# Altium PCB UF_Servo.PcbDoc (part 8 of 12)
Units mm, origin at the board's own origin, x right, y up, seen from the top; angles counter-clockwise.
Board outline 222.63 x 100.1 mm, 6 copper layers (L1, L2, L3, L4, L5, L6), stack 1.609 mm thick; 1138 components, 775 nets, 3720 pads, 1641 vias.
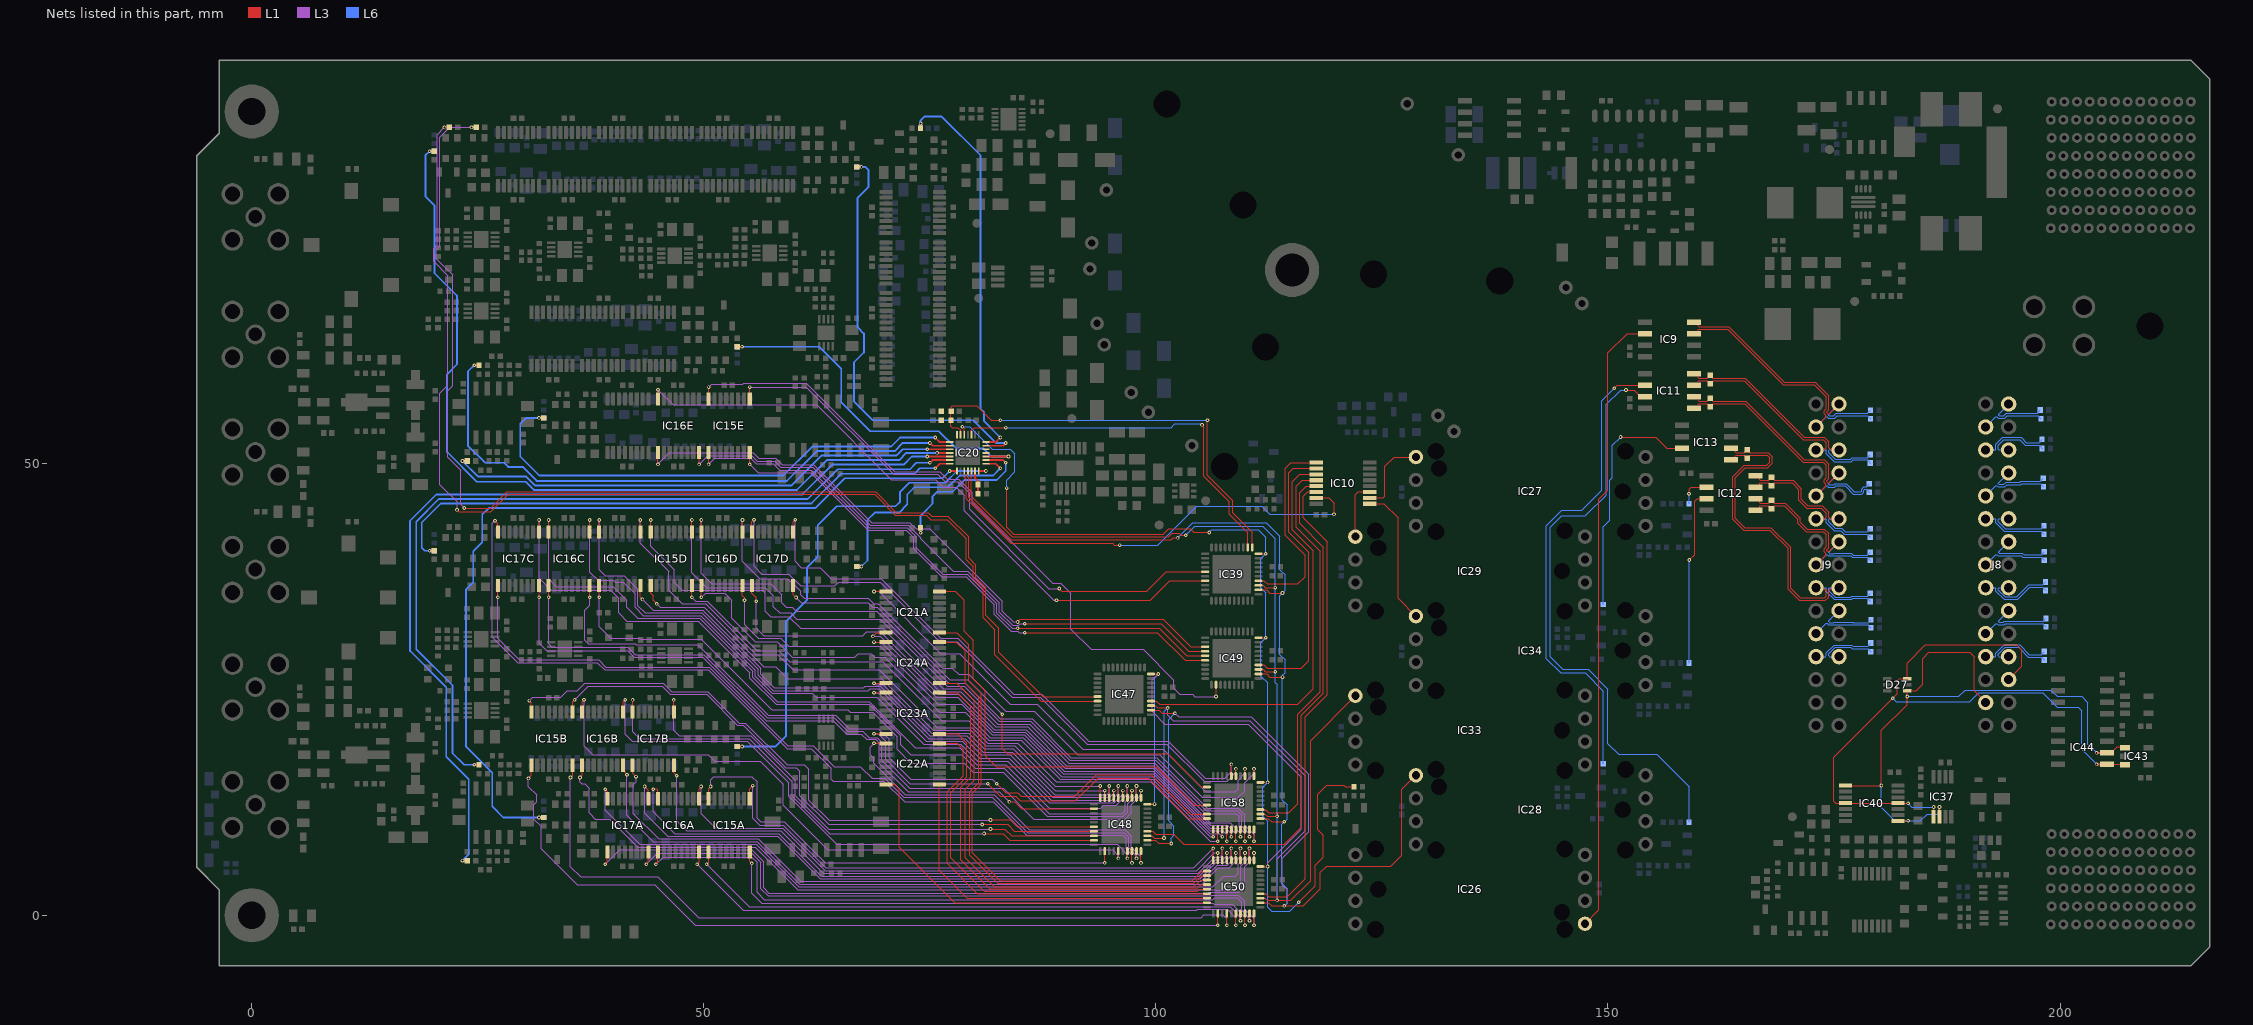
[diagram p9: the nets of this part, all layers, seen from the top]

## Via types
v1: diameter 0.4, hole 0.2, L1 to L6, tented both sides, 1545 vias
v2: diameter 0.4, hole 0.2, L1 to L6, 84 vias
v3: diameter 0.5, hole 0.25, L1 to L6, tented both sides, 12 vias

## Nets (pads, with @x,y where several pads share a name; then routed paths per layer and width w, separated by ;. In a path a pad name is that pad's centre, name@x,y a point inside that pad or via, vN(x,y) a via of type N, cw(c..) or ccw(c..) an arc to the next point about the centre after c; other vN are vias at no path point) (continued)
CAP4.CAP_SEL1.SEL1: IC16E.16 IC49.14 | length 67.4
  L1 w0.1: v1(49.475,49.925) IC16E.16@49.475,51.25 ; v1(85.5,32.3) 100.586,32.3 103.636,29.25 IC49.14@105.45,29.25
  L3 w0.1: v1(49.475,49.925) 50.45,50.9 55.324,50.9 55.924,50.3 57.824,50.3 58.524,49.6 62.024,49.6 68.424,43.2 72.6,43.2 74,41.8 74,41.7 74.4,41.3 77.6,38.1 79.2,38.1 82.7,34.6 82.7,33.6 84.15,32.15 84.845,32.15 84.995,32.3 v1(85.5,32.3)
CAP4.CAP_SEL1.SEL2: IC16E.9 IC49.13 | length 72.2
  L1 w0.1: v1(44.925,49.925) IC16E.9@44.925,51.25 ; v1(84.7,32.5) 85,32.8 100.793,32.8 103.843,29.75 IC49.13@105.45,29.75
  L3 w0.1: v1(44.925,49.925) 46.2,51.2 55.449,51.2 56.049,50.6 57.949,50.6 58.649,49.9 62.149,49.9 68.549,43.5 72.8,43.5 73.5,42.8 75,42.8 83,34.8 83,33.7 84.2,32.5 v1(84.7,32.5)
CAP4.CAP_SEL1.SEL3: IC16E.8 IC39.17 | length 73.1
  L1 w0.1: IC16E.8@44.925,57.15 v1(44.925,58.175) ; v1(89,34.9) 99.386,34.9 101.536,37.05 IC39.17@105.45,37.05
  L3 w0.1: v1(44.925,58.175) 46.6,56.5 62.5,56.5 70.749,48.251 75.649,48.251 76.5,47.4 77.9,47.4 78.8,46.5 78.8,44.8 88.7,34.9 v1(89,34.9)
CAP4.CAP_SEL2.SEL0: IC15E.1 IC39.15 | length 63
  L1 w0.1: IC15E.1@55.075,57.15 v1(55.075,58.475) ; v1(89.3,36.2) 89.6,35.9 98.972,35.9 101.122,38.05 IC39.15@105.45,38.05
  L3 w0.1: v1(55.075,58.475) 61.325,58.475 70.983,48.817 75.883,48.817 76.7,48 78.1,48 79.383,46.717 79.383,44.969 88.151,36.2 v1(89.3,36.2)
CAP4.CAP_SEL2.SEL1: IC15E.16 IC49.16 | length 62
  L1 w0.1: v1(55.075,49.925) IC15E.16@55.075,51.25 ; v1(85.5,31.3) 100.172,31.3 103.222,28.25 IC49.16@105.45,28.25
  L3 w0.1: v1(55.075,49.925) 56,49 61.8,49 63.8,47 68.183,42.617 72.383,42.617 73.2,41.8 73.2,40.6 76.3,37.5 79,37.5 82.119,34.381 82.119,33.356 84.026,31.45 84.745,31.45 84.895,31.3 v1(85.5,31.3)
CAP4.CAP_SEL2.SEL2: IC15E.9 IC49.15 | length 66.9
  L1 w0.1: v1(50.525,49.925) IC15E.9@50.525,51.25 ; v1(84.7,31.8) 100.379,31.8 103.429,28.75 IC49.15@105.45,28.75
  L3 w0.1: v1(50.525,49.925) 51.2,50.6 55.2,50.6 55.8,50 57.7,50 58.4,49.3 61.9,49.3 68.3,42.9 72.5,42.9 73.483,41.917 73.483,40.717 76.4,37.8 79.124,37.8 82.419,34.505 82.419,33.481 84.1,31.8 v1(84.7,31.8)
CAP4.CAP_SEL2.SEL3: IC15E.8 IC49.22 | length 76.8
  L1 w0.1: IC15E.8@50.525,57.15 v1(50.525,58.475) ; v1(106.65,24.25) IC49.22@106.65,25.55
  L3 w0.1: v1(50.525,58.475) 50.85,58.8 54.3,58.8 54.4,58.9 61.3,58.9 71.1,49.1 76.1,49.1 76.9,48.3 78.2,48.3 79.7,46.8 79.7,45.7 88.6,36.8 89.5,36.8 90.6,35.7 90.6,31.7 92.823,29.477 98.577,29.477 102,26.054 102,25.155 102.655,24.5 104.05,24.5 104.3,24.25 v1(106.65,24.25)
CAP5.CAP_SEL0.SEL0: IC15C.1 IC58.22 | length 83.9
  L1 w0.1: IC15C.1@42.975,42.45 v1(42.975,43.775) ; v1(106.85,8.25) IC58.22@106.85,9.55
  L3 w0.1: v1(42.975,43.775) 42.975,41.225 46.1,38.1 46.1,36 47.6,34.5 50.2,34.5 55.8,28.9 58.2,28.9 59.9,27.2 69.4,27.2 75.8,20.8 79.7,20.8 81.4,19.1 84.7,19.1 89,14.8 99.45,14.8 106,8.25 v1(106.85,8.25)
CAP5.CAP_SEL0.SEL1: IC15C.16 IC48.8 | length 64.9
  L1 w0.1: IC15C.16@42.975,36.55 42.975,35.225 v1(43.2,35) ; IC48.8@94.85,13.05 v1(94.85,14.35)
  L3 w0.1: v1(43.2,35) 44.4,33.8 49.897,33.8 56.3,27.397 56.3,26.7 57.8,25.2 67.7,25.2 67.875,25.375 69.525,25.375 75,19.9 79.1,19.9 80.9,18.1 84.1,18.1 88.8,13.4 94.6,13.4 94.85,13.65 v1(94.85,14.35)
CAP5.CAP_SEL0.SEL2: IC15C.9 IC48.2 | length 77.3
  L1 w0.1: v1(38.425,35.225) IC15C.9@38.425,36.55 ; IC48.2@97.85,13.05 v1(97.85,14.35)
  L3 w0.1: v1(38.425,35.225) 38.425,31.975 39.7,30.7 42.9,30.7 43,30.6 49.7,30.6 57.5,22.8 65.9,22.8 66.2,22.5 68.7,22.5 71.4,19.8 71.4,18.4 72.9,16.9 78.8,16.9 79.8,15.9 83.1,15.9 88,11 96.4,11 96.9,11.5 96.9,12.4 97.85,13.35 v1(97.85,14.35)
CAP5.CAP_SEL0.SEL3: IC15C.8 IC48.7 | length 77.1
  L1 w0.1: IC15C.8@38.425,42.45 v1(38.425,43.775) ; IC48.7@95.35,13.05 v1(95.35,13.85)
  L3 w0.1: v1(38.425,43.775) 38.425,38.275 39.1,37.6 41.2,37.6 42.7,36.1 42.7,34.3 43.5,33.5 49.773,33.5 56,27.273 56,26.6 57.7,24.9 68.2,24.9 68.4,25.1 69.4,25.1 74.9,19.6 78.9,19.6 80.7,17.8 83.9,17.8 88.6,13.1 94.9,13.1 95.35,13.55 v1(95.35,13.85)
CAP5.CAP_SEL1.SEL0: IC16C.1 IC48.5 | length 79.5
  L1 w0.1: IC16C.1@37.375,42.45 v1(37.375,43.775) ; IC48.5@96.35,13.05 v1(96.35,13.85)
  L3 w0.1: v1(37.375,43.775) 37.375,38.025 38.3,37.1 40,37.1 40.2,36.9 41.1,36.9 42.4,35.6 42.4,34.1 43.3,33.2 49.649,33.2 55.7,27.149 55.7,26.5 57.58,24.62 61.998,24.62 62.418,24.2 69.1,24.2 74.3,19 78.4,19 80.3,17.1 83.6,17.1 88.2,12.5 95.4,12.5 96.35,13.45 v1(96.35,13.85)
CAP5.CAP_SEL1.SEL1: IC16C.16 IC58.18 | length 86.3
  L1 w0.1: v1(37.375,35.225) IC16C.16@37.375,36.55 ; v1(82.4,14.6) 83.4,13.6 84.7,13.6 85.1,13.2 91,13.2 93.4,15.6 99.5,15.6 103.85,11.25 IC58.18@105.65,11.25
  L3 w0.1: v1(37.375,35.225) 37.375,34.375 36.8,33.8 36.8,30.5 37.2,30.1 42.4,30.1 42.5,30 49.3,30 57.1,22.2 64.6,22.2 66.1,20.7 69.3,20.7 70.5,19.5 70.5,17.5 72.9,15.1 81.9,15.1 v1(82.4,14.6)
CAP5.CAP_SEL1.SEL2: IC16C.9 IC48.1 | length 84.1
  L1 w0.1: v1(32.825,35.225) IC16C.9@32.825,36.55 ; IC48.1@98.35,13.05 v1(98.35,13.85)
  L3 w0.1: v1(32.825,35.225) 32.825,30.075 33.2,29.7 41.6,29.7 42.4,28.9 50,28.9 57,21.9 64.4,21.9 65.9,20.4 67.6,20.4 68.3,19.7 69.2,19.7 69.7,19.2 69.7,17.2 72.8,14.1 83.1,14.1 86.5,10.7 96.6,10.7 97.3,11.4 97.3,12.3 98.35,13.35 v1(98.35,13.85)
CAP5.CAP_SEL1.SEL3: IC16C.8 IC48.4 | length 86
  L1 w0.1: IC16C.8@32.825,42.45 v1(32.825,43.775) ; IC48.4@96.85,13.05 v1(96.85,14.35)
  L3 w0.1: v1(32.825,43.775) 32.825,37.275 33.7,36.4 40,36.4 41.5,34.9 41.5,34.1 42.7,32.9 49.524,32.9 55.4,27.024 55.4,26.4 58.1,23.7 68.3,23.7 73.4,18.6 78.3,18.6 80.2,16.7 83.4,16.7 88.2,11.9 93.9,11.9 94.2,12.2 95.6,12.2 96.85,13.45 v1(96.85,14.35)
CAP5.CAP_SEL2.SEL0: IC17C.1 IC48.3 | length 88.7
  L1 w0.1: IC17C.1@31.775,42.45 v1(31.775,43.775) ; IC48.3@97.35,13.05 v1(97.35,13.85)
  L3 w0.1: v1(31.775,43.775) 31.775,37.325 33.1,36 39.7,36 40.6,35.1 40.6,33.5 41.5,32.6 49.4,32.6 55.1,26.9 55.1,26.3 58,23.4 68.3,23.4 71.8,19.9 71.8,18.9 72.9,17.8 78.5,17.8 80,16.3 83.2,16.3 88.2,11.3 96.3,11.3 96.6,11.6 96.6,12.6 97.35,13.35 v1(97.35,13.85)
CAP5.CAP_SEL2.SEL1: IC17C.16 IC48.12 | length 76.7
  L1 w0.1: v1(31.775,35.225) IC17C.16@31.775,36.55 ; v1(83.8,12.6) 84.4,12.6 85.15,11.85 IC48.12@93.15,11.85
  L3 w0.1: v1(31.775,35.225) 31.775,30.125 32.6,29.3 41.6,29.3 42.3,28.6 49.9,28.6 56.9,21.6 64.3,21.6 65.8,20.1 67.4,20.1 68,19.5 69,19.5 69.4,19.1 69.4,16.9 72.6,13.7 82.7,13.7 v1(83.8,12.6)
CAP5.CAP_SEL2.SEL2: IC17C.9 IC48.29 | length 88.3
  L1 w0.1: v1(27.225,35.225) IC17C.9@27.225,36.55 ; v1(97.85,6.35) IC48.29@97.85,7.15
  L3 w0.1: v1(27.225,35.225) 27.225,30.675 29.6,28.3 38.349,28.3 39.149,27.5 50.6,27.5 59.3,18.8 62.1,18.8 64.4,16.5 67.3,16.5 68.6,15.2 70,15.2 72.1,13.1 81.9,13.1 85.8,9.2 96.5,9.2 97,8.7 97,7.5 97.85,6.65 v1(97.85,6.35)
CAP5.CAP_SEL2.SEL3: IC17C.8 IC48.28 | length 98.7
  L1 w0.1: v1(26.9,43.7) 27.225,43.375 IC17C.8@27.225,42.45 ; v1(97.35,5.85) IC48.28@97.35,7.15
  L3 w0.1: v1(26.9,43.7) 26.6,43.4 26.6,30.8 29.4,28 38.224,28 39.024,27.2 50.5,27.2 59.2,18.5 61.9,18.5 64.1,16.3 64.1,15.1 64.3,14.9 69.9,14.9 72.2,12.6 82,12.6 85.7,8.9 96.4,8.9 96.7,8.6 96.7,7.4 97.35,6.75 v1(97.35,5.85)
CAP6.CAP_SEL0.SEL0: IC15D.1 IC48.10 | length 61
  L1 w0.1: IC15D.1@44.125,36.55 44.125,35.675 44.4,35.4 44.4,34.9 v1(44.8,34.5) ; IC48.10@93.85,13.05 v1(93.85,14.35)
  L3 w0.1: v1(44.8,34.5) 45.2,34.1 50.021,34.1 56.6,27.521 57.979,27.521 59.3,26.2 69.7,26.2 75.4,20.5 79.5,20.5 81.2,18.8 84.4,18.8 88.85,14.35 v1(93.85,14.35)
CAP6.CAP_SEL0.SEL1: IC15D.16 IC58.28 | length 88
  L1 w0.1: IC15D.16@44.125,42.45 v1(44.125,43.775) ; v1(109.85,8.25) IC58.28@109.85,9.55
  L3 w0.1: v1(44.125,43.775) 44.125,40.875 46.7,38.3 46.7,36.9 47.6,36 56.5,36 56.8,35.7 56.8,33.7 57.4,33.1 59.4,33.1 60.7,31.8 69.8,31.8 76.5,25.1 78.6,25.1 82.5,21.2 86.051,21.2 90.351,16.9 99.851,16.9 105.451,11.3 108.9,11.3 109.2,11 109.2,9.8 109.85,9.15 v1(109.85,8.25)
CAP6.CAP_SEL0.SEL2: IC15D.9 IC58.29 | length 83.3
  L1 w0.1: IC15D.9@48.675,42.45 v1(48.675,43.775) ; v1(110.35,8.75) IC58.29@110.35,9.55
  L3 w0.1: v1(48.675,43.775) 48.675,37.925 50.3,36.3 56.8,36.3 57.7,35.4 57.7,34.2 58.4,33.5 59.6,33.5 60.3,32.8 69.5,32.8 76.9,25.4 78.8,25.4 82.7,21.5 86.175,21.5 90.475,17.2 99.976,17.2 105.576,11.6 109,11.6 109.5,11.1 109.5,9.9 110.35,9.05 v1(110.35,8.75)
CAP6.CAP_SEL0.SEL3: IC15D.8 IC58.21 | length 70.8
  L1 w0.1: v1(48.675,35.225) IC15D.8@48.675,36.55 ; v1(106.35,8.75) IC58.21@106.35,9.55
  L3 w0.1: v1(48.675,35.225) 49.1,34.8 50.4,34.8 55.9,29.3 58.3,29.3 59.5,28.1 69.8,28.1 76.3,21.6 79.3,21.6 81.5,19.4 85.107,19.4 89.407,15.1 99.65,15.1 106,8.75 v1(106.35,8.75)
CAP6.CAP_SEL1.SEL0: IC16D.1 IC58.23 | length 72.6
  L1 w0.1: v1(49.725,35.225) IC16D.1@49.725,36.55 ; v1(107.35,8.75) IC58.23@107.35,9.55
  L3 w0.1: v1(49.725,35.225) 50.2,35.7 52.3,35.7 53.1,34.9 53.1,32.9 55.7,30.3 58.1,30.3 59.8,28.6 66.7,28.6 67.1,29 68.5,29 68.9,28.6 70,28.6 76.1,22.5 78.9,22.5 81.7,19.7 85.302,19.7 89.602,15.4 99.7,15.4 106,9.1 107,9.1 v1(107.35,8.75)
CAP6.CAP_SEL1.SEL1: IC16D.16 IC58.30 | length 83.6
  L1 w0.1: IC16D.16@49.725,42.45 v1(49.725,43.775) ; v1(110.85,8.25) IC58.30@110.85,9.55
  L3 w0.1: v1(49.725,43.775) 49.725,37.875 50.9,36.7 57.4,36.7 58.6,35.5 58.6,34.6 59.1,34.1 59.8,34.1 60.2,33.7 69.1,33.7 77.1,25.7 78.9,25.7 82.8,21.8 86.299,21.8 90.599,17.5 100.1,17.5 105.7,11.9 109.1,11.9 109.8,11.2 109.8,10 110.85,8.95 v1(110.85,8.25)
CAP6.CAP_SEL1.SEL2: IC16D.9 IC58.1 | length 76.4
  L1 w0.1: IC16D.9@54.275,42.45 v1(54.275,43.775) ; IC58.1@110.85,15.45 v1(110.85,16.25)
  L3 w0.1: v1(54.275,43.775) 54.275,39.225 56.2,37.3 59.3,37.3 60.7,35.9 60.7,35.5 61.1,35.1 68.2,35.1 68.8,34.5 69.3,34.5 76.4,27.4 77.5,27.4 78.2,26.7 79.3,26.7 83.4,22.6 86.566,22.6 91.366,17.8 100.4,17.8 105.1,13.1 109.1,13.1 109.8,13.8 109.8,14.7 110.85,15.75 v1(110.85,16.25)
CAP6.CAP_SEL1.SEL3: IC16D.8 IC58.24 | length 69.4
  L1 w0.1: IC16D.8@54.275,36.55 54.275,35.425 54.5,35.2 v1(54.5,34.9) ; v1(107.85,8.25) IC58.24@107.85,9.55
  L3 w0.1: v1(54.5,34.9) 54.5,32.2 56,30.7 58.5,30.7 59.4,29.8 69.5,29.8 75.9,23.4 78.5,23.4 81.9,20 85.426,20 89.726,15.7 99.7,15.7 106,9.4 107.4,9.4 107.85,8.95 v1(107.85,8.25)
CAP6.CAP_SEL2.SEL0: IC17D.1 IC58.27 | length 69.4
  L1 w0.1: IC17D.1@55.325,36.55 55.325,35.675 55.8,35.2 v1(55.8,34.8) ; v1(109.35,8.75) IC58.27@109.35,9.55
  L3 w0.1: v1(55.8,34.8) 55.8,31.8 56.6,31 67.6,31 68,31.4 69.5,31.4 76.1,24.8 78.4,24.8 82.3,20.9 85.799,20.9 90.099,16.6 99.7,16.6 106,10.3 108.2,10.3 109.35,9.15 v1(109.35,8.75)
CAP6.CAP_SEL2.SEL1: IC17D.16 IC58.5 | length 71.7
  L1 w0.1: IC17D.16@55.325,42.45 55.325,43.575 v1(55.55,43.8) ; IC58.5@108.85,15.45 v1(108.85,16.25)
  L3 w0.1: v1(55.55,43.8) 55.55,38.65 56.4,37.8 59.4,37.8 60.7,36.5 64.5,36.5 64.9,36.9 69.5,36.9 76.1,30.3 78,30.3 84.1,24.2 87.228,24.2 92.428,19 101.221,19 105.321,14.9 107.9,14.9 108.85,15.85 v1(108.85,16.25)
CAP6.CAP_SEL2.SEL2: IC17D.9 IC58.6 | length 66.6
  L1 w0.1: IC17D.9@59.875,42.45 59.875,43.575 v1(60.1,43.8) ; IC58.6@108.35,15.45 v1(108.35,16.75)
  L3 w0.1: v1(60.1,43.8) 60.1,39.2 60.8,38.5 62.9,38.5 64.1,37.3 69.6,37.3 76.2,30.7 78.1,30.7 84.3,24.5 87.353,24.5 92.553,19.3 101.346,19.3 105.446,15.2 107.6,15.2 108.35,15.95 v1(108.35,16.75)
CAP6.CAP_SEL2.SEL3: IC17D.8 IC58.12 | length 57.8
  L1 w0.1: IC17D.8@59.875,36.55 59.875,35.525 v1(60.2,35.2) ; v1(83,22.3) 83,18.5 83.6,17.9 101.3,17.9 104.95,14.25 IC58.12@105.65,14.25
  L3 w0.1: v1(60.2,35.2) 60.8,34.6 68.2,34.6 68.7,34.1 69.2,34.1 77.2,26.1 79.2,26.1 v1(83,22.3)
CAP7.CAP_SEL0.SEL0: IC22A.1 IC50.18 | length 40.4
  L1 w0.1: IC22A.1@76.05,14.525 76.05,5.05 79.15,1.95 IC50.18@105.65,1.95
CAP7.CAP_SEL0.SEL1: IC22A.16 IC50.19 | length 44.7
  L1 w0.1: IC22A.16@70.15,14.525 71.075,14.525 71.6,14 71.6,7.6 77.75,1.45 IC50.19@105.65,1.45
CAP7.CAP_SEL0.SEL2: IC22A.9 IC48.30 | length 40.4
  L1 w0.1: v1(68.825,19.075) IC22A.9@70.15,19.075 ; v1(98.35,5.85) IC48.30@98.35,7.15
  L3 w0.1: v1(68.825,19.075) 68.4,18.65 68.4,17.8 68.8,17.4 68.8,16.9 72.3,13.4 82.1,13.4 86,9.5 96.6,9.5 97.3,8.8 97.3,7.6 98.35,6.55 v1(98.35,5.85)
CAP7.CAP_SEL0.SEL3: IC22A.8 IC50.17 | length 46.4
  L1 w0.1: IC22A.8@76.05,19.075 78.025,19.075 78.7,18.4 78.7,15.5 76.9,13.7 76.9,5.8 80.25,2.45 IC50.17@105.65,2.45
CAP7.CAP_SEL1.SEL0: IC23A.1 IC50.16 | length 46.9
  L1 w0.1: IC23A.1@76.05,20.125 78.075,20.125 79.1,19.1 79.1,15.4 77.3,13.6 77.3,6.4 81,2.7 104.6,2.7 104.85,2.95 IC50.16@105.65,2.95
CAP7.CAP_SEL1.SEL1: IC23A.16 IC58.19 | length 45.3
  L1 w0.1: v1(68.825,20.125) IC23A.16@70.15,20.125 ; v1(81.4,14.6) 82.8,13.2 84.5,13.2 85,12.7 91.1,12.7 93.6,15.2 99.2,15.2 103.65,10.75 IC58.19@105.65,10.75
  L3 w0.1: v1(68.825,20.125) 69.275,20.125 70.1,19.3 70.1,17.3 72.8,14.6 v1(81.4,14.6)
CAP7.CAP_SEL1.SEL2: IC23A.9 IC48.6 | length 35.7
  L1 w0.1: v1(68.825,24.675) IC23A.9@70.15,24.675 ; IC48.6@95.85,13.05 v1(95.85,14.35)
  L3 w0.1: v1(68.825,24.675) 69.225,24.675 74.6,19.3 78.6,19.3 80.5,17.4 83.8,17.4 88.4,12.8 95.1,12.8 95.85,13.55 v1(95.85,14.35)
CAP7.CAP_SEL1.SEL3: IC23A.8 IC50.15 | length 50.3
  L1 w0.1: IC23A.8@76.05,24.675 78.025,24.675 79.5,23.2 79.5,15.3 78.4,14.2 78.4,6.2 81.6,3 104.5,3 104.95,3.45 IC50.15@105.65,3.45
CAP7.CAP_SEL2.SEL0: IC24A.1 IC50.14 | length 50.8
  L1 w0.1: IC24A.1@76.05,25.725 77.975,25.725 79.9,23.8 79.9,15 78.9,14 78.9,6.4 82.1,3.2 104.2,3.2 104.95,3.95 IC50.14@105.65,3.95
CAP7.CAP_SEL2.SEL1: IC24A.16 IC48.9 | length 32.6
  L1 w0.1: v1(68.825,25.725) IC24A.16@70.15,25.725 ; IC48.9@94.35,13.05 v1(94.35,13.85)
  L3 w0.1: v1(68.825,25.725) 68.884,25.725 69.034,25.575 69.825,25.575 75.2,20.2 79.3,20.2 81,18.5 84.2,18.5 88.85,13.85 v1(94.35,13.85)
CAP7.CAP_SEL2.SEL2: IC24A.9 IC58.25 | length 50.7
  L1 w0.1: v1(68.825,30.275) IC24A.9@70.15,30.275 ; v1(108.35,8.75) IC58.25@108.35,9.55
  L3 w0.1: v1(68.825,30.275) 69.625,30.275 75.7,24.2 78.1,24.2 82,20.3 85.551,20.3 89.851,16 99.7,16 106,9.7 107.7,9.7 108.35,9.05 v1(108.35,8.75)
CAP7.CAP_SEL2.SEL3: IC24A.8 IC50.13 | length 54.8
  L1 w0.1: IC24A.8@76.05,30.275 77.925,30.275 78.9,29.3 78.9,25.7 80.4,24.2 80.4,14.7 79.4,13.7 79.4,6.7 82.5,3.6 104.2,3.6 105.05,4.45 IC50.13@105.65,4.45
CAP7.CAP_SEL3.SEL0: IC21A.1 IC50.12 | length 55.5
  L1 w0.1: IC21A.1@76.05,31.325 77.975,31.325 79.3,30 79.3,26 80.7,24.6 80.7,14.576 79.7,13.576 79.7,7 82.8,3.9 104,3.9 105.05,4.95 IC50.12@105.65,4.95
CAP7.CAP_SEL3.SEL1: IC21A.16 IC58.26 | length 52.9
  L1 w0.1: v1(68.7,30.9) 69.125,31.325 IC21A.16@70.15,31.325 ; v1(108.85,8.25) IC58.26@108.85,9.55
  L3 w0.1: v1(68.7,30.9) 69.5,30.9 75.9,24.5 78.2,24.5 82.1,20.6 85.675,20.6 89.975,16.3 99.7,16.3 106,10 107.9,10 108.85,9.05 v1(108.85,8.25)
CAP7.CAP_SEL3.SEL2: IC21A.9 IC58.3 | length 54.3
  L1 w0.1: v1(68.825,35.875) IC21A.9@70.15,35.875 ; IC58.3@109.85,15.45 v1(109.85,16.25)
  L3 w0.1: v1(68.825,35.875) 69.325,35.875 76.2,29 78.3,29 83.9,23.4 86.897,23.4 91.897,18.4 100.8,18.4 105.5,13.7 108.8,13.7 109.1,14 109.1,15 109.85,15.75 v1(109.85,16.25)
CAP7.CAP_SEL3.SEL3: IC21A.8 IC58.16 | length 48.1
  L1 w0.1: IC21A.8@76.05,35.875 77.825,35.875 78.8,34.9 78.8,31.5 79.8,30.5 79.8,26.2 81.1,24.9 81.1,17.7 82.339,16.461 100.039,16.461 104.25,12.25 IC58.16@105.65,12.25
CAP8.CAP_SEL0.SEL0: IC17B.1 IC50.5 | length 77.7
  L1 w0.1: IC17B.1@42.125,16.65 42.125,15.775 v1(42.5,15.4) ; IC50.5@108.85,6.15 v1(108.85,6.95)
  L3 w0.1: v1(42.5,15.4) 42.5,14.8 42.2,14.5 42.2,11.3 45,8.5 56,8.5 60.7,3.8 105,3.8 106.8,5.6 107.9,5.6 108.85,6.55 v1(108.85,6.95)
CAP8.CAP_SEL0.SEL1: IC17B.16 IC48.19 | length 61.8
  L1 w0.1: IC17B.16@42.125,22.55 v1(42.125,23.875) ; v1(81,9.1) 83.1,9.1 83.85,8.35 IC48.19@93.15,8.35
  L3 w0.1: v1(42.125,23.875) 42.125,20.375 42.9,19.6 55,19.6 59.8,14.8 59.8,13.2 63.9,9.1 v1(81,9.1)
CAP8.CAP_SEL0.SEL2: IC17B.9 IC48.18 | length 57
  L1 w0.1: IC17B.9@46.675,22.55 v1(46.675,23.875) ; v1(81.7,9.6) 83.3,9.6 84.05,8.85 IC48.18@93.15,8.85
  L3 w0.1: v1(46.675,23.875) 46.675,20.525 47.3,19.9 55.2,19.9 60.1,15 60.1,13.3 63.8,9.6 v1(81.7,9.6)
CAP8.CAP_SEL0.SEL3: IC17B.8 IC50.8 | length 71.9
  L1 w0.1: IC17B.8@46.675,16.65 46.675,15.825 v1(47,15.5) ; IC50.8@107.35,6.15 v1(107.35,7.45)
  L3 w0.1: v1(47,15.5) 47,10.5 48.1,9.4 58.5,9.4 63.2,4.7 104.7,4.7 106.5,6.5 107.1,6.5 107.35,6.75 v1(107.35,7.45)
CAP8.CAP_SEL1.SEL0: IC16B.1 IC50.2 | length 87.6
  L1 w0.1: v1(36.3,15.3) 36.525,15.525 IC16B.1@36.525,16.65 ; IC50.2@110.35,6.15 v1(110.35,7.45)
  L3 w0.1: v1(36.3,15.3) 36.3,14.8 36.5,14.6 36.8,14.6 37.3,14.1 37.3,11.4 38,10.7 39.6,10.7 42.7,7.6 55.7,7.6 60.4,2.9 106.6,2.9 106.7,2.8 108.9,2.8 109.4,3.3 109.4,5.5 110.35,6.45 v1(110.35,7.45)
CAP8.CAP_SEL1.SEL1: IC16B.16 IC48.25 | length 73.2
  L1 w0.1: IC16B.16@36.525,22.55 36.525,23.675 v1(36.75,23.9) ; v1(95.85,6.35) IC48.25@95.85,7.15
  L3 w0.1: v1(36.75,23.9) 36.75,18.75 37.7,17.8 50.5,17.8 51.2,17.1 56.266,17.1 58.8,14.566 58.8,12.2 63.7,7.3 95.2,7.3 95.85,6.65 v1(95.85,6.35)
CAP8.CAP_SEL1.SEL2: IC16B.9 IC48.27 | length 68.4
  L1 w0.1: IC16B.9@41.075,22.55 41.075,23.675 v1(41.3,23.9) ; v1(96.85,6.35) IC48.27@96.85,7.15
  L3 w0.1: v1(41.3,23.9) 41.3,20.1 42.1,19.3 54.8,19.3 59.4,14.7 59.4,13.2 64.7,7.9 95.7,7.9 96.85,6.75 v1(96.85,6.35)
CAP8.CAP_SEL1.SEL3: IC16B.8 IC50.4 | length 80.2
  L1 w0.1: IC16B.8@41.075,16.65 41.075,16.15 41.3,15.925 41.3,15.8 v1(41.5,15.6) ; IC50.4@109.35,6.15 v1(109.35,7.45)
  L3 w0.1: v1(41.5,15.6) 41.5,11.1 44.4,8.2 55.9,8.2 60.6,3.5 105.1,3.5 106.9,5.3 108.1,5.3 109.35,6.55 v1(109.35,7.45)
CAP8.CAP_SEL2.SEL0: IC15B.1 IC50.22 | length 89.9
  L1 w0.1: v1(30.6,15.2) 30.925,15.525 IC15B.1@30.925,16.65 ; v1(106.85,-1.05) IC50.22@106.85,0.25
  L3 w0.1: v1(30.6,15.2) 30.6,14.3 31.5,13.4 31.5,12.6 31.2,12.3 31.2,10.7 32,9.9 32,7.4 35.983,3.417 44.583,3.417 49.05,-1.05 v1(106.85,-1.05)
CAP8.CAP_SEL2.SEL1: IC15B.16 IC48.16 | length 73.2
  L1 w0.1: v1(30.7,23.8) 30.925,23.575 IC15B.16@30.925,22.55 ; v1(81.7,10.6) 83.9,10.6 84.65,9.85 IC48.16@93.15,9.85
  L3 w0.1: v1(30.7,23.8) 31.1,24.2 34.2,24.2 34.9,24.9 36,24.9 36.8,25.7 45.524,25.7 46.424,24.8 50.424,24.8 53.912,21.312 54.588,21.312 59.2,16.7 61.1,16.7 61.6,16.2 61.6,12.8 63.847,10.553 81.653,10.553 v1(81.7,10.6)
CAP8.CAP_SEL2.SEL2: IC15B.9 IC48.17 | length 67.7
  L1 w0.1: IC15B.9@35.475,22.55 35.475,23.675 v1(35.7,23.9) ; v1(80.8,10.1) 83.6,10.1 84.35,9.35 IC48.17@93.15,9.35
  L3 w0.1: v1(35.7,23.9) 37.2,25.4 45.4,25.4 46.3,24.5 50.3,24.5 53.7,21.1 54.376,21.1 59.076,16.4 60.2,16.4 60.6,16 60.6,13.3 63.8,10.1 v1(80.8,10.1)
CAP8.CAP_SEL2.SEL3: IC15B.8 IC50.24 | length 88.5
  L1 w0.1: v1(35.25,15.3) 35.475,15.525 IC15B.8@35.475,16.65 ; v1(107.85,-1.05) IC50.24@107.85,0.25
  L3 w0.1: v1(35.25,15.3) 35.25,5.45 36.4,4.3 44.924,4.3 49.424,-0.2 105,-0.2 105.3,0.1 107.4,0.1 107.85,-0.35 v1(107.85,-1.05)
CAP9.CAP_SEL0.SEL0: IC17A.1 IC50.6 | length 75.5
  L1 w0.1: v1(43.45,14.3) 43.875,13.875 IC17A.1@43.875,12.95 ; IC50.6@108.35,6.15 v1(108.35,7.45)
  L3 w0.1: v1(43.45,14.3) 43.45,11.35 46,8.8 58.2,8.8 62.9,4.1 104.9,4.1 106.7,5.9 107.6,5.9 108.35,6.65 v1(108.35,7.45)
CAP9.CAP_SEL0.SEL1: IC17A.16 IC50.30 | length 76.5
  L1 w0.1: v1(43.65,5.7) 43.875,5.925 IC17A.16@43.875,7.05 ; v1(110.85,-1.05) IC50.30@110.85,0.25
  L3 w0.1: v1(43.65,5.7) 44.85,6.9 55.3,6.9 56.3,5.9 56.3,3 57.1,2.2 106.1,2.2 106.2,2.3 109.1,2.3 109.8,1.6 109.8,0.7 110.85,-0.35 v1(110.85,-1.05)
CAP9.CAP_SEL0.SEL2: IC17A.9 IC50.1 | length 81.8
  L1 w0.1: v1(39.1,5.7) 39.325,5.925 IC17A.9@39.325,7.05 ; IC50.1@110.85,6.15 v1(110.85,6.95)
  L3 w0.1: v1(39.1,5.7) 40.7,7.3 55.3,7.3 56.6,6 56.6,3.1 57.2,2.5 105.8,2.5 105.9,2.6 109.2,2.6 109.8,3.2 109.8,5.4 110.85,6.45 v1(110.85,6.95)
CAP9.CAP_SEL0.SEL3: IC17A.8 IC50.3 | length 80.9
  L1 w0.1: v1(39.1,14) 39.325,13.775 IC17A.8@39.325,12.95 ; IC50.3@109.85,6.15 v1(109.85,6.95)
  L3 w0.1: v1(39.1,14) 39.1,11.7 42.9,7.9 55.8,7.9 60.5,3.2 106.3,3.2 107.5,4.4 108.8,4.4 109.1,4.7 109.1,5.7 109.85,6.45 v1(109.85,6.95)
CAP9.CAP_SEL1.SEL0: IC16A.1 IC50.9 | length 65.8
  L1 w0.1: IC16A.1@49.475,12.95 49.475,14.075 v1(49.7,14.3) ; IC50.9@106.85,6.15 v1(106.85,6.95)
  L3 w0.1: v1(49.7,14.3) 49.7,11.3 51.3,9.7 58.7,9.7 63.4,5 104.5,5 106.45,6.95 v1(106.85,6.95)
CAP9.CAP_SEL1.SEL1: IC16A.16 IC50.26 | length 65.7
  L1 w0.1: v1(49.25,5.7) 49.475,5.925 IC16A.16@49.475,7.05 ; v1(108.85,-1.05) IC50.26@108.85,0.25
  L3 w0.1: v1(49.25,5.7) 54.35,0.6 104.5,0.6 104.6,0.7 107.9,0.7 108.85,-0.25 v1(108.85,-1.05)
CAP9.CAP_SEL1.SEL2: IC16A.9 IC50.29 | length 73.9
  L1 w0.1: v1(44.7,5.7) 44.925,5.925 IC16A.9@44.925,7.05 ; v1(110.35,-0.55) IC50.29@110.35,0.25
  L3 w0.1: v1(44.7,5.7) 45.5,6.5 55.3,6.5 55.9,5.9 55.9,2.6 56.7,1.8 106.3,1.8 106.5,2 109,2 109.5,1.5 109.5,0.6 110.35,-0.25 v1(110.35,-0.55)
CAP9.CAP_SEL1.SEL3: IC16A.8 IC50.7 | length 72.4
  L1 w0.1: v1(44.4,14) 44.425,14.025 44.775,14.025 44.925,13.875 IC16A.8@44.925,12.95 ; IC50.7@107.85,6.15 v1(107.85,6.95)
  L3 w0.1: v1(44.4,14) 44.4,11.5 46.8,9.1 58.3,9.1 63,4.4 104.8,4.4 106.6,6.2 107.4,6.2 107.85,6.65 v1(107.85,6.95)
CAP9.CAP_SEL2.SEL0: IC15A.1 IC50.10 | length 60.6
  L1 w0.1: IC15A.1@55.075,12.95 55.075,14.075 v1(55.4,14.4) ; IC50.10@106.35,6.15 v1(106.35,7.45)
  L3 w0.1: v1(55.4,14.4) 55.4,10.8 56.2,10 58.8,10 63.5,5.3 104.2,5.3 v1(106.35,7.45)
CAP9.CAP_SEL2.SEL1: IC15A.16 IC50.28 | length 62.5
  L1 w0.1: IC15A.16@55.075,7.05 55.075,6.025 v1(55.3,5.8) ; v1(109.85,-1.05) IC50.28@109.85,0.25
  L3 w0.1: v1(55.3,5.8) 55.3,2.5 56.4,1.4 106.3,1.4 106.45,1.25 108.45,1.25 109.85,-0.15 v1(109.85,-1.05)
CAP9.CAP_SEL2.SEL2: IC15A.9 IC50.27 | length 64.1
  L1 w0.1: v1(50.3,5.7) 50.525,5.925 IC15A.9@50.525,7.05 ; v1(109.35,-0.55) IC50.27@109.35,0.25
  L3 w0.1: v1(50.3,5.7) 55,1 108.2,1 109.35,-0.15 v1(109.35,-0.55)
CAP9.CAP_SEL2.SEL3: IC15A.8 IC48.22 | length 53.5
  L1 w0.1: IC15A.8@50.525,12.95 50.525,14.075 v1(50.75,14.3) ; v1(94.35,5.85) IC48.22@94.35,7.15
  L3 w0.1: v1(50.75,14.3) 50.75,15.05 51.1,15.4 55.3,15.4 55.9,14.8 55.9,10.8 56.3,10.4 58.9,10.4 63.45,5.85 v1(94.35,5.85)
CSn_0: IC10.1 IC34.8 | length 15.5
  L1 w0.1: IC10.1@123.65,45.575 125.225,45.575 126.8,44 126.8,35.102 IC34.8@128.762,33.141
CSn_1: IC10.2 IC27.8 | length 8.9
  L1 w0.1: IC10.2@123.65,46.225 125.125,46.225 125.3,46.4 125.3,49.7 126.341,50.741 IC27.8@128.762,50.741
CSn_2: IC10.3 IC29.8 | length 6.3
  L1 w0.1: IC29.8@122.062,41.941 122.062,46.562 122.375,46.875 IC10.3@123.65,46.875
CSn_DAC: IC10.15 IC20.3 | length 51.5
  L1 w0.1: IC20.3@78.8,49.2 78.8,48.5 79,48.3 79,46.151 83.951,41.2 95.2,41.2 95.4,41 v1(96,41) ; IC10.15@117.75,46.225 119.1,46.225 119.7,45.625 v1(119.7,44.4)
  L6 w0.1: v1(96,41) 100.2,41 104.5,45.3 111.7,45.3 112.6,44.4 v1(119.7,44.4)
CSn_EXP0: IC10.9 IC39.34 | length 22.2
  L1 w0.1: IC39.34@111.35,37.05 111.95,37.05 112.3,36.7 115.7,36.7 116.5,37.5 116.5,39.9 114.3,42.1 114.3,49.5 114.925,50.125 IC10.9@117.75,50.125
CSn_EXP1: IC10.10 IC49.34 | length 31
  L1 w0.1: IC49.34@111.35,27.75 111.95,27.75 112.3,27.4 116.1,27.4 116.9,28.2 116.9,40.2 114.7,42.4 114.7,49 115.175,49.475 IC10.10@117.75,49.475
CSn_EXP2: IC10.11 IC47.34 | length 45.6
  L1 w0.1: IC47.34@99.45,23.75 100.05,23.75 100.4,23.4 115.7,23.4 117.4,25.1 117.4,40.4 115.1,42.7 115.1,48 115.925,48.825 IC10.11@117.75,48.825
CSn_EXP3: IC10.12 IC58.34 | length 44.5
  L1 w0.1: IC58.34@111.55,11.75 112.15,11.75 112.5,11.4 114.7,11.4 115.7,12.4 115.7,22.3 118.178,24.778 118.178,40.322 115.5,43 115.5,47.5 116.175,48.175 IC10.12@117.75,48.175
CSn_EXP4: IC10.13 IC48.34 | length 59.7
  L1 w0.1: IC48.34@99.05,9.35 99.65,9.35 100,9 102,9 103.1,7.9 114.2,7.9 116.1,9.8 116.1,22.2 118.531,24.631 118.531,40.769 115.9,43.4 115.9,46.8 116.625,47.525 IC10.13@117.75,47.525
CSn_EXP5: IC10.14 IC50.34 | length 52
  L1 w0.1: IC50.34@111.55,2.45 112.15,2.45 112.5,2.1 114.5,2.1 116.5,4.1 116.5,22 118.956,24.456 118.956,41.344 116.3,44 116.3,46.4 116.775,46.875 IC10.14@117.75,46.875
DAC_GAIN: IC20.6 R75.1 R78.2 | length 2.6
  L1 w0.2: IC20.6@80,49.2 80,48.4 80.33,48.07 R78.2@80.33,46.7
DAC_LDACn: IC20.17 IC39.2 | length 42
  L1 w0.1: IC20.17@79.6,53.2 79.6,53.7 79.9,54 v1(83.4,54) ; v1(105.1,54.3) 105.3,54.1 105.3,48.6 108.1,45.8 108.1,44.4 110.15,42.35 IC39.2@110.15,40.75
  L6 w0.1: v1(83.4,54) 101.7,54 102.1,54.4 104.919,54.4 105.019,54.3 v1(105.1,54.3)
DAC_RESETn: C191.2 IC20.20 IC39.1 R76.1 | length 49
  L1 w0.1: IC20.20@78.4,53.2 78.4,53.7 78.1,54 77.5,54 77.33,54.17 R76.1@77.33,54.8 77.33,55.78 C191.2@77.35,55.8 77.35,56.25 77.5,56.4 80.2,56.4 81.8,54.8 v1(82.8,54.8) ; v1(105.7,54.8) 105.7,48.7 108.5,45.9 108.5,44.6 110.65,42.45 IC39.1@110.65,40.75
  L6 w0.1: v1(82.8,54.8) v1(105.7,54.8)
DAC_SCLK: IC20.4 IC28.8 IC39.32 IC47.32 IC48.32 IC49.32 IC50.32 IC58.32 | length 174.8
  L1 w0.1: IC20.4@79.2,49.2 79.2,48.5 79.3,48.4 79.3,46.276 83.976,41.6 101.7,41.6 101.9,41.8 v1(102.4,41.8) ; IC48.32@99.05,8.35 99.95,8.35 100.3,8 v1(101.7,8) ; IC47.32@99.45,22.75 100.35,22.75 100.7,22.4 v1(102.1,22.4) ; IC49.32@111.35,26.75 112.25,26.75 112.6,26.4 v1(114,26.4) ; IC39.32@111.35,36.05 112.25,36.05 112.6,35.7 v1(114,35.7) ; IC50.32@111.55,1.45 112.45,1.45 112.8,1.1 v1(114.2,1.1) 116.3,1.1 118.2,3 118.2,4.8 118.9,5.5 126,5.5 127.194,6.694 127.194,13.973 IC28.8@128.762,15.541 ; IC58.32@111.55,10.75 112.45,10.75 112.8,10.4 v1(114.2,10.4)
  L3 w0.1: v1(102.1,22.4) 102.5,22 110.531,22 116.9,15.631 116.9,9.269 114,6.369 114,3.4 114.5,2.9 114.5,1.4 v1(114.2,1.1) ; 102.1,22.6 v1@102.2,22.5
  L6 w0.1: v1(101.7,8) 101.7,8.6 102,8.9 102,9.9 101.4,10.5 101.4,21.7 v1(102.1,22.4) ; v1(102.4,41.8) 104.1,43.5 112.2,43.5 113.7,42 113.7,38.3 114.3,37.7 114.3,36 v1(114,35.7) 113.7,35.4 113.7,28.9 114.3,28.3 114.3,26.9 114,26.6 v1(114,26.4) 114,12.8 114.5,12.3 114.5,10.7 v1(114.2,10.4) 113.9,10.1 113.9,3.6 114.5,3 114.5,1.4 v1(114.2,1.1)
DAC_SDI: IC20.5 IC33.8 IC39.33 IC47.33 IC48.33 IC49.33 IC50.33 IC58.33 | length 166.7
  L1 w0.1: IC20.5@79.6,49.2 79.6,46.4 84.1,41.9 101.4,41.9 101.8,42.3 102.6,42.3 102.8,42.1 v1(103.3,42.1) ; IC48.33@99.05,8.85 99.55,8.85 99.8,8.6 v1(100.9,8.6) ; IC47.33@99.45,23.25 99.95,23.25 100.2,23 v1(101.3,23) ; IC49.33@111.35,27.25 111.85,27.25 112.1,27 v1(113.2,27) ; IC39.33@111.35,36.55 111.85,36.55 112.1,36.3 v1(113.2,36.3) ; IC50.33@111.55,1.95 112.05,1.95 112.3,1.7 v1(113.4,1.7) 114.9,1.7 117.1,3.9 117.1,19.379 IC33.8@122.062,24.341 ; IC58.33@111.55,11.25 112.05,11.25 112.3,11 v1(113.4,11)
  L3 w0.1: v1(101.3,23) 101.3,22.2 101.9,21.6 110.366,21.6 116.5,15.466 116.5,9.434 113.4,6.334 v1(113.4,1.7)
  L6 w0.1: v1@100.9,8.7 100.9,22.6 v1(101.3,23) ; v1(103.3,42.1) 104.3,43.1 111.8,43.1 113.2,41.7 v1(113.2,36.3) v1(113.2,27) 113.2,25.8 113.4,25.6 v1(113.4,11) v1(113.4,1.7)
DAC_SDO: IC20.19 IC39.40 IC47.40 IC48.40 IC49.40 IC50.40 IC58.40 R81.2 | length 165.3
  L1 w0.1: v1(78.6,54.1) 78.8,53.9 IC20.19@78.8,53.2 ; v1(83.5,47.3) 83.5,43 84.3,42.2 100.8,42.2 101.4,42.8 103.8,42.8 104.2,42.4 v1(105.9,42.4) ; IC48.40@99.05,12.35 v1(99.85,12.35) ; IC47.40@99.45,26.75 v1(100.25,26.75) ; IC49.40@111.35,30.75 v1(112.15,30.75) ; IC39.40@111.35,40.05 v1(112.15,40.05) ; IC50.40@111.55,5.45 v1(112.35,5.45) ; IC58.40@111.55,14.75 v1(112.35,14.75) ; v1(115.8,1.5) 117.6,3.3 117.6,5.6 118.5,6.5 118.5,8.9 117.894,9.506 117.894,13.456 118.894,14.456 120.794,14.456 120.955,14.294 R81.2@121.906,14.294
  L3 w0.1: v1(100.25,26.75) 99.6,26.1 99.6,22.6 101,21.2 110.2,21.2 116.1,15.3 116.1,9.6 112.35,5.85 v1(112.35,5.45)
  L6 w0.1: v1(78.6,54.1) 79.4,54.1 81.9,51.6 83.9,51.6 84.4,51.1 84.4,49.1 83.5,48.2 v1(83.5,47.3) ; v1(99.85,12.35) 99.85,26.35 v1(100.25,26.75) ; v1(105.9,42.4) 106.2,42.7 111.3,42.7 112.15,41.85 v1(112.15,40.05) 111.6,39.5 111.6,36.3 112.15,35.75 v1(112.15,30.75) 111.6,30.2 111.6,26.5 112.35,25.75 v1(112.35,14.75) 111.8,14.2 111.8,11 112.35,10.45 112.35,0.95 112.8,0.5 114.8,0.5 v1(115.8,1.5)
DAC_VOUT0: IC20.24 R68B.1 | length 57.2
  L1 w0.2: v1(74.7,51.6) IC20.24@77.2,51.6
  L1 w0.3: v1(23.3,50.3) R68B.1@23.83,50.3
  L6 w0.2: v1(23.3,50.3) 25,48.6 30.3,48.6 31.3,47.6 59.7,47.6 63,50.9 71.3,50.9 72,51.6 v1(74.7,51.6)
DAC_VOUT1: IC20.23 R73B.1 | length 66.5
  L1 w0.2: v1(75,52.3) 75.3,52 IC20.23@77.2,52
  L1 w0.3: v1(24.6,60.9) R73B.1@25.13,60.9
  L6 w0.2: v1(24.6,60.9) 23.9,60.2 23.9,52 25.8,50.1 27.9,50.1 28.35,49.65 29.95,49.65 31.5,48.1 59.2,48.1 62.5,51.4 71.1,51.4 72,52.3 v1(75,52.3)
DAC_VOUT2: IC20.25 R62G.2 R208G.2 | length 95.5
  L1 w0.2: v1(19.67,84.57) R208G.2@20.2,84.57 ; v1(75.8,51.2) IC20.25@77.2,51.2
  L6 w0.2: R62G.2@20.2,84.57 v1(19.67,84.57) 19.2,84.1 19.2,79.6 20.2,78.6 20.2,71.1 22.7,68.6 22.7,61 21.6,59.9 21.6,51.3 24.9,48 30.3,48 31.2,47.1 60.3,47.1 63.6,50.4 71.6,50.4 72.4,51.2 v1(75.8,51.2)
DAC_VOUT3: IC20.13 R62H.2 R208H.2 | length 49.8
  L1 w0.2: R208H.2@66.9,82.83 v1(67.43,82.83) ; IC20.13@81.2,52 83.1,52 v1(83.4,52.3)
  L6 w0.2: R62H.2@66.9,82.83 67.87,82.83 68.2,82.5 68.2,80.6 67,79.4 67,65.1 67.7,64.4 67.7,62.3 66.6,61.2 66.6,56.9 68.7,54.8 79.8,54.8 82.3,52.3 v1(83.4,52.3)
DAC_VOUT4: IC20.14 R65B.2 R210B.2 | length 43.9
  L1 w0.2: R65B.2@73.97,87.1 v1(73.97,87.63) ; IC20.14@81.2,52.4 82.3,52.4 v1(82.8,52.9)
  L6 w0.2: R210B.2@73.97,87.1 v1(73.97,87.63) 73.97,87.97 74.4,88.4 76.3,88.4 80.6,84.1 80.6,56.1 81,55.7 81,54.7 v1(82.8,52.9)
DAC_VOUT5: IC20.10 R62F.2 R208F.2 | length 40.2
  L1 w0.2: R208F.2@53.7,62.93 v1(54.23,62.93) ; IC20.10@81.2,50.8 v1(83.7,50.8)
  L6 w0.2: R62F.2@53.7,62.93 v1(54.23,62.93) 62.77,62.93 65.2,60.5 65.2,56.8 68.4,53.6 76,53.6 77.9,51.7 80.9,51.7 81.8,50.8 v1(83.7,50.8)
DAC_VOUT6: IC20.22 R62E.2 R208E.2 | length 57.3
  L1 w0.2: v1(31.77,55.07) R208E.2@32.3,55.07 ; v1(75.6,52.9) 76.1,52.4 IC20.22@77.2,52.4
  L6 w0.2: R62E.2@32.3,55.07 v1(31.77,55.07) 30.37,55.07 29.7,54.4 29.7,50.8 31.8,48.7 58.8,48.7 62,51.9 70.7,51.9 71.7,52.9 v1(75.6,52.9)
DAC_VOUT7: IC20.26 R68A.1 | length 103.8
  L1 w0.2: v1(74.7,50.8) IC20.26@77.2,50.8
  L1 w0.3: v1(23.3,6.1) R68A.1@23.83,6.1
  L6 w0.2: v1(23.3,6.1) 24,6.8 24,15.1 21.5,17.6 21.5,25.3 17.5,29.3 17.5,43.7 20.4,46.6 60.9,46.6 64.2,49.9 72.1,49.9 73,50.8 v1(74.7,50.8)
DAC_VOUT8: IC20.27 R73A.1 | length 92.5
  L1 w0.2: v1(75,50.1) 75.3,50.4 IC20.27@77.2,50.4
  L1 w0.3: v1(24.6,16.7) R73A.1@25.13,16.7
  L6 w0.2: v1(24.6,16.7) 23.5,16.7 22.2,18 22.2,25.5 18.2,29.5 18.2,43.6 20.7,46.1 61.5,46.1 64.8,49.4 72.8,49.4 73.5,50.1 v1(75,50.1)
DAC_VOUT9: IC20.28 R62C.2 R208C.2 | length 66
  L1 w0.2: v1(19.67,40.37) R208C.2@20.2,40.37 ; v1(75.6,49.5) 76.1,50 IC20.28@77.2,50
  L6 w0.2: R62C.2@20.2,40.37 v1(19.67,40.37) 19.13,40.37 18.8,40.7 18.8,43.5 20.9,45.6 61.9,45.6 65.2,48.9 73.3,48.9 73.9,49.5 v1(75.6,49.5)
DAC_VOUT10: IC20.8 R62D.2 R208D.2 | length 26
  L1 w0.2: R208D.2@66.9,38.63 v1(67.43,38.63) ; IC20.8@81.2,50 82.3,50 v1(82.8,49.5)
  L6 w0.2: R62D.2@66.9,38.63 v1(67.43,38.63) 68.1,39.3 68.1,43.8 68.9,44.6 71.6,44.6 72.5,45.5 72.5,46.6 73.3,47.4 77,47.4 78.3,48.7 82,48.7 v1(82.8,49.5)
DAC_VOUT11: IC20.9 R65A.2 R210A.2 | length 17.6
  L1 w0.2: v1(73.97,42.37) R65A.2@73.97,42.9 ; IC20.9@81.2,50.4 83.1,50.4 v1(83.4,50.1)
  L6 w0.2: v1(73.97,42.37) R210A.2@73.97,42.9 73.97,44.27 75.3,45.6 75.3,46.4 75.8,46.9 77.5,46.9 78.8,48.2 82.4,48.2 83.4,49.2 v1(83.4,50.1)
DAC_VOUT12: IC20.7 R62B.2 R208B.2 | length 53.7
  L1 w0.2: R208B.2@53.7,18.73 v1(54.23,18.73) ; IC20.7@80.4,49.2 v1(81.2,49.2)
  L6 w0.2: R62B.2@53.7,18.73 v1(54.23,18.73) 57.93,18.73 59.1,19.9 59.1,32.6 61.4,34.9 61.4,38.5 62.6,39.7 62.6,43.2 64.7,45.3 71.2,45.3 71.7,45.8 71.7,46.9 72.7,47.9 76.7,47.9 78,49.2 v1(81.2,49.2)
DAC_VOUT13: IC20.1 R62A.2 R208A.2 | length 95.5
  L1 w0.2: v1(31.77,10.87) R208A.2@32.3,10.87 ; v1(77.2,49.2) IC20.1@78,49.2
  L6 w0.2: R62A.2@32.3,10.87 v1(31.77,10.87) 27.83,10.87 26.6,12.1 26.6,15.8 23.7,18.7 23.7,36.1 24.5,36.9 24.5,40.3 25.5,41.3 25.5,44.4 26.2,45.1 62.3,45.1 65.6,48.4 76.4,48.4 v1(77.2,49.2)
DAC_VOUT14: IC20.12
DAC_VOUT15: IC20.11
DAC_VREF: C192.2 IC20.21 R77.2
DIOT_CSn_0: IC12.7 R98.2 | length 19.6
  L1 w0.125: v1(158.994,39.356) 159.594,39.956 159.594,45.856 159.859,46.121 IC12.7@160.894,46.121
  L6 w0.125: R98.2@158.964,27.956 158.994,27.986 v1(158.994,39.356)
DIOT_CSn_1: IC12.6 R82.2 | length 3.6
  L1 w0.125: v1(158.964,46.686) 158.993,46.715 158.993,47.155 159.229,47.391 IC12.6@160.894,47.391
  L6 w0.125: R82.2@158.964,45.556 v1(158.964,46.686)
DIOT_CSn_2: IC13.7 R90.2 | length 26.6
  L1 w0.125: v1(151.394,52.956) 155.294,52.956 156.529,51.721 IC13.7@158.194,51.721
  L6 w0.125: R90.2@149.494,34.426 149.494,43.056 150.194,43.756 150.194,48.156 150.494,48.456 150.494,52.056 v1(151.394,52.956)
DIOT_SPI_CLK: IC11.7 R89.2 | length 66
  L1 w0.125: v1(151.994,58.156) 152.884,58.156 153.381,57.658 153.856,57.658 IC11.7@154.094,57.421
  L6 w0.125: v1(151.994,58.156) 151.394,58.156 149.794,56.556 149.794,46.537 147.587,44.331 147.569,44.331 147.494,44.256 144.894,44.256 143.594,42.956 143.594,28.656 144.994,27.256 147.794,27.256 149.994,25.056 149.994,19.056 151.194,17.856 155.394,17.856 158.964,14.286 R89.2@158.964,10.356
DIOT_SPI_MISO: IC9.2 IC26.8 | length 69.2
  L1 w0.125: IC26.8@147.462,-0.879 148.994,0.653 148.994,46.056 149.994,47.056 149.994,62.256 152.129,64.391 IC9.2@154.094,64.391
DIOT_SPI_MOSI: IC11.6 R97.2 | length 53.7
  L1 w0.125: v1(150.694,58.356) 151.029,58.691 IC11.6@154.094,58.691
  L6 w0.125: R97.2@149.494,16.826 149.494,24.856 147.494,26.856 144.794,26.856 143.194,28.456 143.194,43.156 144.894,44.856 147.094,44.856 149.294,47.056 149.294,56.956 v1(150.694,58.356)
EEM0_I2C.SCL: D27.1 IC37.2 IC40.1 IC40.8 IC43.1 IC44.6 J8.27 | length 75.1
  L1 w0.125: IC40.1@176.294,14.406 v1(180.244,14.406) 180.244,20.506 183.094,23.356 v1(183.094,24.256) D27.1@183.094,24.906 184.094,24.906 184.794,25.606 184.794,28.456 185.494,29.156 189.994,29.156 190.494,28.656 190.494,24.871 J8.27@191.78,23.584 ; IC40.8@182.094,10.506 v1(183.194,10.506) ; IC37.2@186.669,10.956 v1(186.669,12.031) ; IC44.6@205.194,18.021 205.669,18.021 205.906,18.258 205.906,18.268 206.344,18.706 IC43.1@207.194,18.706
  L1 w0.2: v1(204.044,18.021) IC44.6@205.194,18.021
  L6 w0.125: v1(180.244,14.406) 180.244,12.006 181.744,10.506 v1(183.194,10.506) 184.544,10.506 185.294,11.256 186.394,11.256 186.669,11.531 v1(186.669,12.031) ; v1(183.094,24.256) 188.794,24.256 189.494,24.956 198.994,24.956 199.694,24.256 202.394,24.256 203.094,23.556 203.094,18.971 v1(204.044,18.021)
EEM0_I2C.SDA: D27.3 IC37.1 IC40.4 IC40.11 IC43.3 IC44.5 J8.26 | length 81.2
  L1 w0.125: v1(183.194,12.456) IC40.11@182.094,12.456 IC40.4@176.294,12.456 175.194,12.456 174.994,12.656 174.994,17.556 v1(181.494,24.056) 181.994,24.556 181.994,25.956 182.244,26.206 D27.3@183.094,26.206 183.094,27.956 185.094,29.956 195.194,29.956 195.794,29.356 195.794,27.597 J8.26@194.32,26.124 ; IC37.1@186.019,10.956 v1(186.019,12.031) ; IC44.5@205.194,16.751 207.139,16.751 IC43.3@207.194,16.806
  L1 w0.2: v1(204.044,16.751) IC44.5@205.194,16.751
  L6 w0.125: v1(181.494,24.056) 181.894,23.656 189.994,23.656 190.994,24.656 198.094,24.656 199.694,23.056 201.994,23.056 202.394,22.656 202.394,18.401 v1(204.044,16.751) ; v1(183.194,12.456) 183.619,12.031 v1(186.019,12.031)
EEM_IO.LVDS_N0: J8.3 R161.2 | length 6.9
  L6 w0.125: J8.3@191.78,54.064 192.893,55.176 192.914,55.176 192.919,55.182 193.023,55.182 193.166,55.039 193.864,55.039 194.14,55.316 197.585,55.316 197.659,55.243 197.659,55.211 R161.2@197.886,54.983
EEM_IO.LVDS_N1: J8.6 R162.2 | length 7.2
  L6 w0.125: J8.6@194.32,51.524 193.249,51.524 193.175,51.597 193.175,52.037 193.794,52.656 195.571,52.656 196.174,52.052 197.712,52.052 197.786,51.979 197.786,51.909 R162.2@198.013,51.681
EEM_IO.LVDS_N2: J8.9 R163.2 | length 7.2
  L6 w0.125: J8.9@191.78,46.444 192.91,47.574 193.014,47.574 193.15,47.437 193.882,47.437 194.142,47.697 195.673,47.697 195.742,47.767 197.865,47.767 197.938,47.694 197.938,47.667 R163.2@198.166,47.439
EEM_IO.LVDS_N3: J8.12 R164.2 | length 6.9
  L6 w0.125: J8.12@194.32,43.904 193.249,43.904 193.175,43.831 193.175,43.602 193.964,42.814 197.38,42.814 197.39,42.804 197.916,42.804 197.989,42.877 197.989,42.899 R164.2@198.216,43.127
EEM_IO.LVDS_N4: J8.15 R167.2 | length 7.3
  L6 w0.125: J8.15@191.78,38.824 192.91,39.954 193.014,39.954 193.167,39.8 193.865,39.8 193.901,39.836 195.713,39.836 195.905,39.644 197.966,39.644 198.04,39.571 198.04,39.539 R167.2@198.267,39.311
EEM_IO.LVDS_N5: J8.18 R168.2 | length 7.6
  L6 w0.125: J8.18@194.32,36.284 193.249,36.284 193.175,36.211 193.175,36.008 193.923,35.261 195.229,35.261 196.559,36.591 198.093,36.591 198.167,36.664 198.167,36.696 R168.2@198.394,36.924
EEM_IO.LVDS_N6: J8.21 R169.2 | length 7.4
  L6 w0.125: J8.21@191.78,31.204 192.902,32.325 193.005,32.325 193.159,32.172 193.857,32.172 193.968,32.283 198.144,32.283 198.217,32.21 198.217,32.173 R169.2@198.445,31.945
EEM_IO.LVDS_N7: J8.24 R170.2 | length 7.4
  L6 w0.125: J8.24@194.32,28.664 193.249,28.664 193.175,28.737 193.175,28.939 193.923,29.687 195.411,29.687 196.477,28.621 197.966,28.621 198.04,28.548 198.04,28.515 R170.2@198.267,28.288
EEM_IO.LVDS_N8: IC9.7 J9.3 R171.2 | length 28.9
  L1 w0.125: IC9.7@159.494,64.391 159.754,64.391 159.992,64.628 159.992,64.815 160.065,64.889 163.261,64.889 169.394,58.756 172.794,58.756 174.12,57.43 174.12,56.073 173.899,55.852 173.899,55.521 174.079,55.341 174.079,55.131 J9.3@173.01,54.063
  L6 w0.125: J9.3@173.01,54.063 174.14,55.193 174.244,55.193 174.39,55.046 175.102,55.046 175.371,55.315 176.261,55.315 176.273,55.328 178.739,55.328 178.812,55.255 178.812,55.211 R171.2@179.039,54.983
EEM_IO.LVDS_N9: IC11.4 J9.6 R26.1 R172.2 | length 26.9
  L1 w0.125: IC11.4@159.494,59.961 159.754,59.961 159.992,59.723 159.992,59.536 160.065,59.463 160.973,59.463 161.046,59.536 161.046,59.568 161.274,59.796 R26.1@161.294,59.796 161.314,59.796 161.541,59.568 161.541,59.536 161.614,59.463 165.187,59.463 171.72,52.93 173.907,52.93 174.417,52.419 174.417,51.756 174.65,51.523 J9.6@175.55,51.523
  L6 w0.125: J9.6@175.55,51.523 174.479,51.523 174.405,51.45 174.405,51.201 175.121,50.485 176.828,50.485 177.019,50.676 178.713,50.676 178.786,50.749 178.786,50.793 R172.2@179.014,51.021
EEM_IO.LVDS_N10: IC11.1 J9.9 R25.2 R173.2 | length 29.4
  L1 w0.125: IC11.1@159.494,56.151 159.754,56.151 159.992,56.388 159.992,56.575 160.065,56.649 160.973,56.649 161.046,56.575 161.046,56.543 161.274,56.316 R25.2@161.294,56.316 161.314,56.316 161.541,56.543 161.541,56.575 161.614,56.649 165.113,56.649 171.606,50.156 173.794,50.156 174.12,49.83 174.12,48.453 173.899,48.232 173.899,47.901 174.079,47.721 174.079,47.511 J9.9@173.01,46.443
  L6 w0.125: J9.9@173.01,46.443 174.14,47.573 174.244,47.573 174.39,47.426 175.102,47.426 175.214,47.538 176.228,47.538 177.135,46.631 178.077,46.631 178.304,46.858 178.304,47.077 178.415,47.187 178.612,47.187 178.685,47.114 178.685,47.083 R173.2@178.912,46.855
EEM_IO.LVDS_N11: IC12.4 J9.12 R28.1 R174.2 | length 19.3
  L1 w0.125: IC12.4@166.294,48.661 166.554,48.661 166.792,48.423 166.792,48.236 166.865,48.163 167.773,48.163 167.846,48.236 167.846,48.268 168.074,48.496 R28.1@168.094,48.496 168.114,48.496 168.341,48.268 168.341,48.236 168.414,48.163 170.474,48.163 171.394,47.243 171.394,46.056 172.12,45.33 173.707,45.33 174.417,44.619 174.417,44.056 174.57,43.903 J9.12@175.55,43.903
  L6 w0.125: J9.12@175.55,43.903 174.479,43.903 174.405,43.83 174.405,43.581 175.121,42.865 175.833,42.865 176.227,42.472 178.701,42.472 178.774,42.545 178.774,42.589 R174.2@179.001,42.817
EEM_IO.LVDS_N12: IC12.1 J9.15 R27.2 R175.2 | length 20.8
  L1 w0.125: IC12.1@166.294,44.851 166.554,44.851 166.792,45.088 166.792,45.275 166.865,45.349 167.773,45.349 167.846,45.275 167.846,45.243 168.074,45.016 R27.2@168.094,45.016 168.114,45.016 168.341,45.243 168.341,45.275 168.414,45.349 169.501,45.349 170.994,43.856 170.994,43.442 171.954,42.482 173.828,42.482 174.12,42.19 174.12,40.833 173.899,40.612 173.899,40.281 174.079,40.101 174.079,39.891 J9.15@173.01,38.823
  L6 w0.125: J9.15@173.01,38.823 174.14,39.953 174.244,39.953 174.39,39.806 175.102,39.806 175.131,39.835 176.833,39.835 177.024,39.644 178.713,39.644 178.786,39.57 178.786,39.539 R175.2@179.014,39.311
EEM_IO.LVDS_N13: IC13.1 J9.18 R29.2 R176.2 | length 40.6
  L1 w0.125: IC13.1@163.594,50.451 163.854,50.451 164.092,50.688 164.092,50.875 164.165,50.949 165.073,50.949 165.146,50.875 165.146,50.843 165.374,50.616 165.414,50.616 165.747,50.949 167.601,50.949 167.894,50.656 167.894,50.156 167.568,49.83 165.08,49.83 163.82,48.569 163.82,43.842 165.006,42.656 167.894,42.656 169.92,40.63 169.92,36.142 171.18,34.882 174.057,34.882 174.417,35.242 174.417,35.956 174.613,36.151 175.419,36.151 J9.18@175.55,36.283
  L6 w0.125: J9.18@175.55,36.283 174.479,36.283 174.405,36.21 174.405,35.961 175.121,35.245 176.872,35.245 176.974,35.347 178.713,35.347 178.786,35.42 178.786,35.452 R176.2@179.014,35.679
EEM_IO.LVDS_N14: J9.21 R177.2 | length 6.8
  L6 w0.125: J9.21@173.01,31.203 174.14,32.333 174.244,32.333 174.39,32.186 175.102,32.186 175.131,32.215 176.951,32.215 176.986,32.181 178.793,32.181 178.866,32.107 178.866,32.017 R177.2@179.039,31.844
EEM_IO.LVDS_N15: J9.24 R144.1 | length 6.6
  L6 w0.125: J9.24@175.55,28.663 174.479,28.663 174.405,28.736 174.405,28.985 175.121,29.7 176.877,29.7 177.02,29.557 178.764,29.557 178.837,29.484 178.837,29.43 R144.1@179.065,29.202
EEM_IO.LVDS_P0: J8.2 R145.2 | length 6.6
  L6 w0.125: J8.2@194.32,56.604 193.206,55.49 193.206,55.386 193.28,55.313 193.75,55.313 194.027,55.59 197.522,55.59 197.595,55.663 197.595,55.721 R145.2@197.823,55.948
EEM_IO.LVDS_P1: J8.5 R146.2 | length 7.6
  L6 w0.125: J8.5@191.78,51.524 192.852,51.524 192.902,51.573 192.902,52.151 193.68,52.93 195.684,52.93 196.287,52.326 197.712,52.326 197.786,52.399 197.786,52.47 R146.2@198.013,52.697
EEM_IO.LVDS_P2: J8.8 R147.2 | length 6.9
  L6 w0.125: J8.8@194.32,48.984 193.191,47.854 193.191,47.784 193.264,47.711 193.768,47.711 194.029,47.971 195.559,47.971 195.629,48.041 197.839,48.041 197.913,48.114 197.913,48.152 R147.2@198.14,48.379
EEM_IO.LVDS_P3: J8.11 R148.2 | length 7.4
  L6 w0.125: J8.11@191.78,43.904 192.852,43.904 192.902,43.855 192.902,43.489 193.85,42.54 197.267,42.54 197.277,42.53 197.916,42.53 197.989,42.457 197.989,42.435 R148.2@198.216,42.207
EEM_IO.LVDS_P4: J8.14 R149.2 | length 7
  L6 w0.125: J8.14@194.32,41.364 193.208,40.251 193.208,40.147 193.281,40.074 193.752,40.074 193.788,40.11 195.826,40.11 196.018,39.918 197.966,39.918 198.04,39.992 198.04,40.024 R149.2@198.267,40.251
EEM_IO.LVDS_P5: J8.17 R150.2 | length 8.1
  L6 w0.125: J8.17@191.78,36.284 192.852,36.284 192.902,36.235 192.902,35.895 193.81,34.987 195.342,34.987 196.672,36.317 198.093,36.317 198.167,36.244 198.167,36.212 R150.2@198.394,35.984
EEM_IO.LVDS_P6: J8.20 R151.2 | length 7.2
  L6 w0.125: J8.20@194.32,33.744 193.199,32.622 193.199,32.519 193.272,32.446 193.743,32.446 193.855,32.557 198.144,32.557 198.217,32.631 198.217,32.658 R151.2@198.445,32.885
EEM_IO.LVDS_P7: J8.23 R152.2 | length 7.8
  L6 w0.125: J8.23@191.78,28.664 192.852,28.664 192.902,28.713 192.902,29.053 193.81,29.961 195.524,29.961 196.59,28.895 197.966,28.895 198.04,28.968 198.04,29 R152.2@198.267,29.228
EEM_IO.LVDS_P8: IC9.8 J9.2 R188.2 | length 28.9
  L1 w0.125: IC9.8@159.494,65.661 159.754,65.661 159.992,65.423 159.992,65.236 160.065,65.163 163.374,65.163 169.507,59.03 172.907,59.03 174.394,57.543 174.394,55.959 174.172,55.738 174.172,55.635 174.272,55.535 174.482,55.535 J9.2@175.55,56.603
  L6 w0.125: J9.2@175.55,56.603 174.421,55.473 174.421,55.369 174.494,55.296 174.998,55.296 175.268,55.565 176.157,55.565 176.17,55.578 178.739,55.578 178.812,55.651 178.812,55.696 R188.2@179.039,55.923
EEM_IO.LVDS_P9: IC11.3 J9.5 R26.2 R189.2 | length 26.9
  L1 w0.125: IC11.3@159.494,58.691 159.754,58.691 159.992,58.928 159.992,59.115 160.065,59.189 160.973,59.189 161.046,59.115 161.046,59.083 161.274,58.856 R26.2@161.294,58.856 161.314,58.856 161.541,59.083 161.541,59.115 161.614,59.189 165.073,59.189 171.606,52.656 173.794,52.656 174.144,52.306 174.144,51.756 173.911,51.523 J9.5@173.01,51.523
  L6 w0.125: J9.5@173.01,51.523 174.082,51.523 174.155,51.45 174.155,51.097 175.017,50.235 176.932,50.235 177.122,50.426 178.713,50.426 178.786,50.353 178.786,50.309 R189.2@179.014,50.081
EEM_IO.LVDS_P10: IC11.2 J9.8 R25.1 R190.2 | length 29.5
  L1 w0.125: IC11.2@159.494,57.421 159.754,57.421 159.992,57.183 159.992,56.996 160.065,56.923 160.973,56.923 161.046,56.996 161.046,57.028 161.274,57.256 R25.1@161.294,57.256 161.314,57.256 161.541,57.028 161.541,56.996 161.614,56.923 165.227,56.923 171.72,50.43 173.907,50.43 174.394,49.943 174.394,48.339 174.172,48.118 174.172,48.015 174.272,47.915 174.482,47.915 J9.8@175.55,48.983
  L6 w0.125: J9.8@175.55,48.983 174.421,47.853 174.421,47.749 174.494,47.676 174.998,47.676 175.11,47.788 176.332,47.788 177.238,46.881 177.974,46.881 178.054,46.961 178.054,47.18 178.311,47.437 178.599,47.437 178.672,47.511 178.672,47.548 R190.2@178.9,47.775
EEM_IO.LVDS_P11: IC12.3 J9.11 R28.2 R156.2 | length 19.3
  L1 w0.125: IC12.3@166.294,47.391 166.554,47.391 166.792,47.628 166.792,47.815 166.865,47.889 167.773,47.889 167.846,47.815 167.846,47.783 168.074,47.556 R28.2@168.094,47.556 168.114,47.556 168.341,47.783 168.341,47.815 168.414,47.889 170.361,47.889 171.12,47.13 171.12,45.942 172.006,45.056 173.594,45.056 174.144,44.506 174.144,44.056 173.991,43.903 J9.11@173.01,43.903
  L6 w0.125: J9.11@173.01,43.903 174.082,43.903 174.155,43.83 174.155,43.477 175.017,42.615 175.73,42.615 176.123,42.222 178.701,42.222 178.774,42.149 178.774,42.104 R156.2@179.001,41.877
EEM_IO.LVDS_P12: IC12.2 J9.14 R27.1 R157.2 | length 20.8
  L1 w0.125: IC12.2@166.294,46.121 166.554,46.121 166.792,45.883 166.792,45.696 166.865,45.623 167.773,45.623 167.846,45.696 167.846,45.728 168.074,45.956 R27.1@168.094,45.956 168.114,45.956 168.341,45.728 168.341,45.696 168.414,45.623 169.614,45.623 171.268,43.969 171.268,43.556 172.068,42.756 173.941,42.756 174.394,42.303 174.394,40.719 174.172,40.498 174.172,40.395 174.272,40.295 174.482,40.295 J9.14@175.55,41.363
  L6 w0.125: J9.14@175.55,41.363 174.421,40.233 174.421,40.129 174.494,40.056 174.998,40.056 175.028,40.085 176.936,40.085 177.128,39.894 178.713,39.894 178.786,39.967 178.786,39.998 R157.2@179.014,40.226
EEM_IO.LVDS_P13: IC13.2 J9.17 R29.1 R158.2 | length 40.5
  L1 w0.125: IC13.2@163.594,51.721 163.854,51.721 164.092,51.483 164.092,51.296 164.165,51.223 165.073,51.223 165.146,51.296 165.146,51.328 165.374,51.556 165.414,51.556 165.747,51.223 167.714,51.223 168.168,50.769 168.168,50.042 167.681,49.556 165.194,49.556 164.094,48.456 164.094,43.956 165.12,42.93 168.007,42.93 170.194,40.743 170.194,36.256 171.294,35.156 173.944,35.156 174.144,35.356 174.144,35.956 173.948,36.151 173.142,36.151 J9.17@173.01,36.283
  L6 w0.125: J9.17@173.01,36.283 174.082,36.283 174.155,36.21 174.155,35.857 175.017,34.995 176.976,34.995 177.078,35.097 178.713,35.097 178.786,35.024 178.786,34.992 R158.2@179.014,34.765
EEM_IO.LVDS_P14: J9.20 R159.2 | length 6.6
  L6 w0.125: J9.20@175.55,33.743 174.421,32.613 174.421,32.509 174.494,32.436 174.998,32.436 175.028,32.465 177.054,32.465 177.089,32.431 178.793,32.431 178.866,32.504 178.866,32.585 R159.2@179.039,32.758
EEM_IO.LVDS_P15: J9.23 R143.1 | length 7
  L6 w0.125: J9.23@173.01,28.663 174.082,28.663 174.155,28.736 174.155,29.089 175.017,29.95 176.981,29.95 177.124,29.807 178.751,29.807 178.825,29.88 178.825,29.94 R143.1@179.052,30.167
EXP0_P16: IC47.16 R60G.1 | length 133.1
  L1 w0.1: v1(23.5,45.1) 26.427,45.1 28.227,46.9 69,46.9 71.3,44.6 74.8,44.6 75.2,44.2 77,44.2 79.3,41.9 79.3,39.6 80.1,38.8 80.1,37.4 81.2,36.3 81.2,33.231 82.6,31.831 82.6,29.172 87.522,24.25 IC47.16@93.55,24.25 ; v1(24.3,87.2) R60G.1@24.83,87.2
  L3 w0.1: v1(23.5,45.1) 23.1,45.5 23.1,49.3 21.7,50.7 21.7,58.1 22.2,58.6 22.2,70.9 20.4,72.7 20.4,73.651 20.8,74.051 20.8,86.1 21.9,87.2 v1(24.3,87.2)
EXP0_P17: IC47.17 R61G.1 | length 132
  L1 w0.1: v1(21.3,87.2) R61G.1@21.83,87.2 ; v1(22.7,44.9) 22.9,44.7 26.451,44.7 28.351,46.6 68.876,46.6 71.176,44.3 74.6,44.3 75.1,43.8 76.9,43.8 79,41.7 79,39.4 79.8,38.6 79.8,37.2 80.9,36.1 80.9,32.966 82.2,31.666 82.2,28.864 87.314,23.75 IC47.17@93.55,23.75
  L3 w0.1: v1(21.3,87.2) 20.5,86.4 20.5,74.176 20.1,73.776 20.1,72.4 21.7,70.8 21.7,58.7 20.8,57.8 20.8,47.7 22.7,45.8 v1(22.7,44.9)